# EAGLE board small_8x16 (EAGLE 6.2)
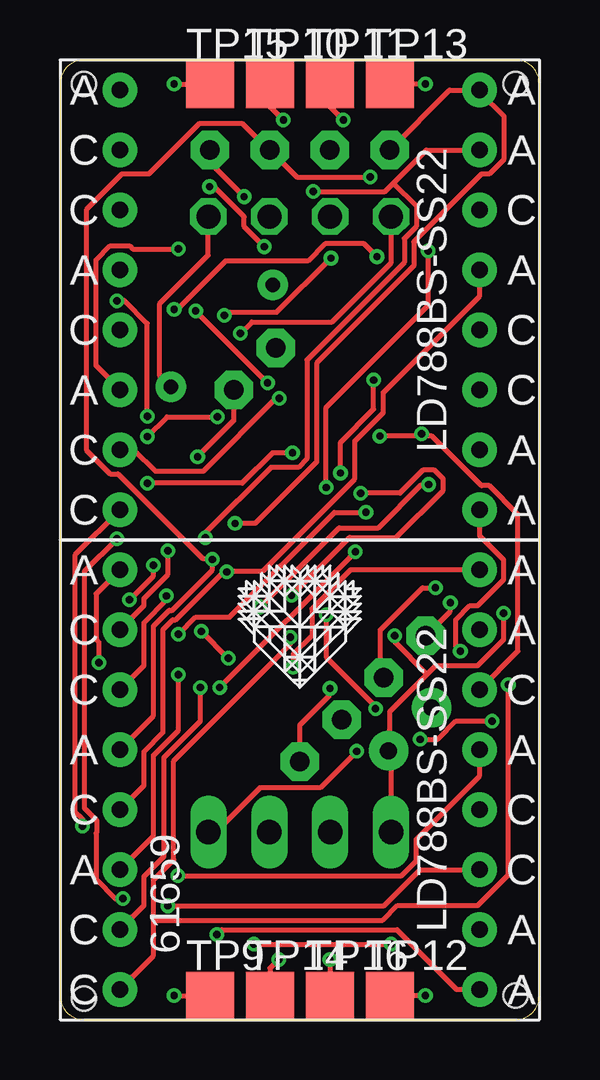
[diagram p0: board, top side]
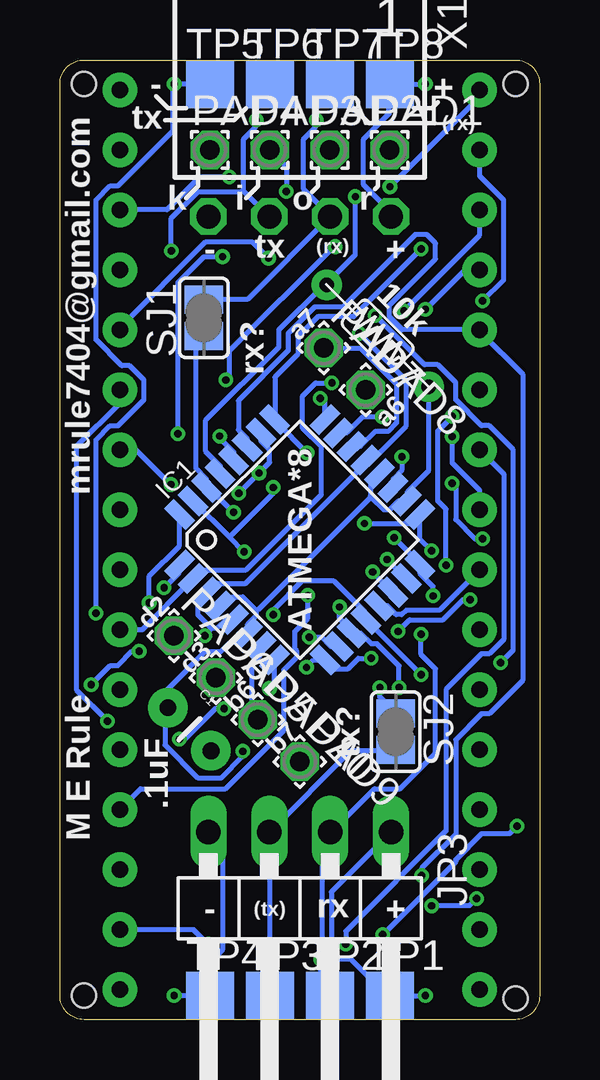
[diagram p1: board, bottom side, seen from below]

Size 20 x 40 mm. Coordinates in mm from the lower left corner, seen from the top.
Outline: 0,39 0,1 arc90 1,0 19,0 arc90 20,1 20,39 arc90 19,40 1,40 arc90 0,39
Copper layers (1*16): Top 0.035mm / dielectric 1.5mm / Bottom 0.035mm
Design rules: minimum track width 8mil, minimum drill 12mil, track to track 7mil, track to pad 7mil, pad to pad 7mil, via to via 7mil, smd to smd 0mil, copper to edge 10mil, drill to drill 10mil, minimum pad ring 10mil, minimum via ring 6mil, stop-mask expansion 2mil, vias tented up to drill 100mil, thermal gap 10mil
Holes 1 mm at 1,39 19,39 1,0.88 19,1

## Footprints (pad centres in the part's own frame; a part is rotated, then mirrored left to right if it is on the bottom)
CAP-PTH-SMALL = drill 0.7 pad 1.651: 1 0,0; 2 2.54,0
TQFP32-08 = smd 1.27 x 0.559: 1 -4.293,2.8; 2 -4.293,2; 3 -4.293,1.2; 4 -4.293,0.4; 5 -4.293,-0.4; 6 -4.293,-1.2; 7 -4.293,-2; 8 -4.293,-2.8; 17 4.293,-2.8; 18 4.293,-2; 19 4.293,-1.2; 20 4.293,-0.4; 21 4.293,0.4; 22 4.293,1.2; 23 4.293,2; 24 4.293,2.8 | smd 0.559 x 1.27: 9 -2.8,-4.293; 10 -2,-4.293; 11 -1.2,-4.293; 12 -0.4,-4.293; 13 0.4,-4.293; 14 1.2,-4.293; 15 2,-4.293; 16 2.8,-4.293; 25 2.8,4.293; 26 2,4.293; 27 1.2,4.293; 28 0.4,4.293; 29 -0.4,4.293; 30 -1.2,4.293; 31 -2,4.293; 32 -2.8,4.293
1X04/90 = drill 1.016 long: 1 -3.81,-3.81; 2 -1.27,-3.81; 3 1.27,-3.81; 4 3.81,-3.81
1,6/0,8 = drill 0.813 pad 1.6 octagon: 1 0,0
SJ = smd 1.168 x 1.6: 1 -0.762,0; 2 0.762,0
TP20SQ = smd 2 x 2: TP 0,0
LD788BS-SS22 = drill 0.7 pad 1.422: A1 -7.5,8.75; A2 -7.5,1.25; A3 -7.5,-3.75; A4 7.5,8.75; A5 7.5,6.25; A6 7.5,1.25; A7 7.5,-6.25; A8 7.5,-8.75; C1 -7.5,6.25; C2 -7.5,3.75; C3 -7.5,-1.25; C4 -7.5,-6.25; C5 -7.5,-8.75; C6 7.5,3.75; C7 7.5,-1.25; C8 7.5,-3.75
R-6 = drill 0.6 pad 1.27: P$1 -3,0; P$2 3,0
SSW-104-02-S-S-RA = drill 1 pad 1.5 octagon: 1 -3.81,1.524; 2 -1.27,1.524; 3 1.27,1.524; 4 3.81,1.524

## Placement (x,y rotation side)
C1  [CAP-PTH-SMALL]  15.5,13 315 bottom
IC1  MEGA8-AI  [TQFP32-08]  10,20 45 bottom
JP3  [1X04/90]  10,4 180 bottom
PAD1  [1,6/0,8]  6.25,36.25 0 bottom
PAD2  [1,6/0,8]  8.75,36.25 0 bottom
PAD3  [1,6/0,8]  11.25,36.25 0 bottom
PAD4  [1,6/0,8]  13.75,36.25 0 bottom
PAD5  [1,6/0,8]  13.5,14.25 315 bottom
PAD6  [1,6/0,8]  15.25,16 315 bottom
PAD7  [1,6/0,8]  9,28 315 bottom
PAD8  [1,6/0,8]  7.25,26.25 315 bottom
PAD9  [1,6/0,8]  10,10.75 315 bottom
PAD10  [1,6/0,8]  11.75,12.5 315 bottom
SJ1  [SJ]  14,29.25 90 bottom
SJ2  [SJ]  6,12 270 bottom
TP1  TPSQTP20SQ  [TP20SQ]  6.25,1 0 bottom
TP2  TPSQTP20SQ  [TP20SQ]  8.75,1 0 bottom
TP3  TPSQTP20SQ  [TP20SQ]  11.25,1 0 bottom
TP4  TPSQTP20SQ  [TP20SQ]  13.75,1 0 bottom
TP5  TPSQTP20SQ  [TP20SQ]  13.75,39 0 bottom
TP6  TPSQTP20SQ  [TP20SQ]  11.25,39 0 bottom
TP7  TPSQTP20SQ  [TP20SQ]  8.75,39 0 bottom
TP8  TPSQTP20SQ  [TP20SQ]  6.25,39 0 bottom
TP9  TPSQTP20SQ  [TP20SQ]  6.25,1 0 top
TP10  TPSQTP20SQ  [TP20SQ]  8.75,39 0 top
TP11  TPSQTP20SQ  [TP20SQ]  11.25,39 0 top
TP12  TPSQTP20SQ  [TP20SQ]  13.75,1 0 top
TP13  TPSQTP20SQ  [TP20SQ]  13.75,39 0 top
TP14  TPSQTP20SQ  [TP20SQ]  8.75,1 0 top
TP15  TPSQTP20SQ  [TP20SQ]  6.25,39 0 top
TP16  TPSQTP20SQ  [TP20SQ]  11.25,1 0 top
U$1  LD788BS-SS22  [LD788BS-SS22]  10,10 0 top
U$2  LD788BS-SS22  [LD788BS-SS22]  10,30 0 top
U$3  R-6  [R-6]  6.75,28.5 315 bottom
U$4  [LOGO]  10,16.38 0 top
X1  SSW-104-02-S-S-RA  [SSW-104-02-S-S-RA]  10,35 180 bottom

## Library data of the parts
C1 = SparkFun
IC1 = atmel; MPN: ATMEGA8-16AU; OC_FARNELL: 9171371; OC_NEWARK: 73M8863
JP3 = pinhead
PAD1-PAD10 = wirepad
SJ1 SJ2 = jumper
TP1-TP16 = testpad
U$1-U$3 = mrule
U$4 = mrule2
X1 = con-samtec; MPN: SSW-104-02-S-S-RA; OC_FARNELL: unknown; OC_NEWARK: 11P9385

## Nets
N$1: IC1.24 U$1.A7 U$2.C4
N$2: IC1.25 U$1.C8 U$2.A3
N$3: IC1.26 U$1.C7 U$2.A1
N$4: IC1.27 U$1.A6 U$2.C3
N$5: IC1.28 U$1.C6 U$2.A2
N$6: IC1.2 U$1.A5 U$2.C2
N$7: IC1.9 U$1.A4 U$2.C1
N$8: IC1.15 PAD2.1 U$1.A2 U$2.C6
N$9: IC1.14 U$1.C3 U$2.A6
N$10: IC1.13 U$1.A1 U$2.C7
N$11: IC1.12 U$1.A3 U$2.C8
N$12: IC1.11 U$1.C4 U$2.A7
N$13: IC1.10 U$1.C5 U$2.A8
N$14: IC1.16 PAD3.1 U$1.C2 U$2.A5
N$15: IC1.17 PAD4.1 U$1.C1 U$2.A4
N$16: IC1.1 PAD5.1
N$17: IC1.23 U$1.A8 U$2.C5
N$18: C1.2 IC1.3 IC1.5 IC1.21 JP3.4 TP4.TP TP5.TP TP12.TP TP13.TP X1.4
N$19: C1.1 IC1.4 IC1.6 IC1.18 IC1.20 JP3.1 TP1.TP TP8.TP TP9.TP TP15.TP U$3.P$2 X1.1
N$20: IC1.32 PAD6.1
N$21: SJ1.2 TP7.TP TP10.TP X1.2
N$22: JP3.3 SJ2.2 TP3.TP TP16.TP
N$23: IC1.31 SJ2.1 TP6.TP TP11.TP X1.3
N$24: IC1.30 JP3.2 SJ1.1 TP2.TP TP14.TP
N$25: IC1.29 PAD1.1 U$3.P$1
N$26: IC1.22 PAD7.1
N$27: IC1.19 PAD8.1
N$28: IC1.8 PAD9.1
N$29: IC1.7 PAD10.1

## Tracks (layer width: path | path; a pad name or v marks a point on that pad's centre or on a via)
N$1  (via drill 0.3)
  Top 0.203: v9.14,25.9 9.02,25.9 5.98,22.86 3.98,22.86 3.1,23.74 U$2.C4 | v8.08,3.14 v13.82,3.14
  Bottom 0.203: v9.14,25.9 8.96,25.72 8.96,25.02 IC1.24 | v13.82,3.14 14.42,3.74 U$1.A7 | v8.08,3.14 8.08,3.68 3.9,7.86 3.9,13.76 2.42,15.24 2.1,15.24 1.5,15.84 1.5,22.74 U$2.C4
N$2  (via drill 0.3)
  Top 0.203: v4.94,32.12 3.04,32.12 2.9,32.26 2.1,32.26 1.5,31.66 1.5,27.26 U$2.A3 | v4.5,4.74 13.52,4.74 15.02,6.24 U$1.C8 | v2.62,5.04 2.3,5.04 1.5,5.84 1.5,7.78 1.54,7.82 1.54,8.3 1.02,8.82 1.02,18.68 v2.38,20.04 | v3.64,22.36 7.6,22.36 8.86,23.62 v9.7,23.62
  Bottom 0.203: v4.94,32.12 7.76,29.3 9.24,29.3 10.08,28.46 10.08,27.74 11.04,26.78 11.04,25.02 IC1.25 11,24.92 v9.7,23.62 | v4.5,4.74 2.92,4.74 v2.62,5.04 | v2.38,20.04 2.7,20.04 3.5,20.84 3.5,22.22 v3.64,22.36
N$3  (via drill 0.3)
  Top 0.203: v12.54,21.94 14.18,21.94 15.14,22.9 15.62,22.9 15.98,22.54 15.98,22.06 14.02,20.1 12.08,20.1 v9.66,17.68 | v6.24,34.72 6.42,34.72 7.68,33.46 7.68,33.06 v8.52,32.22 | v13.08,26.66 13.08,25.44 11.7,24.06 v11.7,22.78
  Bottom 0.203: v12.54,21.94 v11.7,22.78 11.26,23.22 11.26,23.76 11.62,24.12 IC1.26 | v9.66,17.68 9.66,16.72 10.2,16.18 10.2,15.44 10.12,15.36 10.12,15.12 10.66,14.58 10.66,12.06 13.1,9.62 16.64,9.62 U$1.C7 | U$2.A1 2.5,38.46 v6.24,34.72 | v8.52,32.22 8.58,32.22 12.92,27.88 12.92,26.82 v13.08,26.66
N$4  (via drill 0.3)
  Top 0.203: U$1.A6 17.5,10.16 14.86,7.52 14.86,6.62 14.24,6 v4.92,6
  Bottom 0.203: IC1.27 12.2,23.9 12.2,24.22 12.56,24.58 12.56,25.8 10.48,27.88 10.48,28.6 9.38,29.7 8.2,29.7 5.18,32.72 4.7,32.72 4.34,32.36 4.34,31.7 6.26,29.78 6.26,29.3 5.72,28.76 U$2.C3 2.46,28.66 0.7,26.9 0.7,14.14 2.1,12.74 2.42,12.74 3.5,11.66 3.5,7.72 4.92,6.3 v4.92,6
N$5  (via drill 0.3)
  Top 0.203: 15.08,24.32 15.52,24.32 17.58,22.26 17.9,22.26 19.1,21.06 19.1,15.36 U$1.C6 | 15.08,24.32 v13.34,24.32 | v4.76,29.6 4.88,29.6 6.9,31.62 10.34,31.62 11.06,32.34 12.68,32.34 v13.22,31.8 | v15.08,24.42 15.08,24.32
  Bottom 0.203: v13.34,24.32 13.34,24.24 12.76,23.66 IC1.28 | v4.76,29.6 3.12,31.24 U$2.A2 | v13.22,31.8 14,31.8 15.08,30.72 v15.08,24.42
N$6  (via drill 0.3)
  Top 0.203: v8.66,26.54 v5.66,29.54
  Bottom 0.203: U$1.A5 16.56,16.26 14.46,18.36 IC1.2 14.36,18.42 14.04,18.74 12.24,18.74 9.1,21.88 9.1,23.86 9.88,24.64 9.88,26 9.34,26.54 v8.66,26.54 | U$2.C2 2.5,32.7 v5.66,29.54
N$7  (via drill 0.3)
  Top 0.203: v9.72,14.68 9.72,15.22 10.5,16 10.5,17.12 12.12,18.74 U$1.A4 | v2.38,29.96 2.7,29.96 3.64,29.02 v3.64,25.14 | v3.9,18.94 3.9,18.5 v2.9,17.5 | v7.02,15.06 v5.9,16.18
  Bottom 0.203: v9.72,14.68 9.42,14.98 8.96,14.98 IC1.9 8.88,14.9 8.6,14.62 8,14.62 7.56,15.06 v7.02,15.06 | U$2.C1 2.5,35.16 1.5,34.16 1.5,30.84 v2.38,29.96 | v3.64,25.14 4.24,24.54 4.24,21.62 3.9,21.28 v3.9,18.94 | v2.9,17.5 3.2,17.5 4.04,16.66 5.42,16.66 v5.9,16.18
N$8  (via drill 0.3)
  Top 0.203: U$1.A2 3.9,12.66 3.9,16.4 4.56,17.06 4.68,17.06 6.36,18.74 v6.36,19.18 6.26,19.22 5.94,19.22 2.42,22.74 2.1,22.74 1.1,23.74 1.1,33.76 2.58,35.24 3.7,35.24 5.8,37.34 7.62,37.34 8.66,36.3 PAD2.1 9.88,35.12 v12.94,35.12
  Bottom 0.203: v6.36,19.18 IC1.15 | v12.94,35.12 14.18,35.12 15.54,33.76 U$2.C6
N$9  (via drill 0.3)
  Top 0.203: U$1.C3 3.5,9.76 3.5,11.16 4.3,11.96 4.3,16.26 4.7,16.66 4.82,16.66 6.82,18.66 v6.96,18.66 7.06,18.7 8.46,18.7 12.3,22.54 12.3,24.12 13.48,25.3 13.48,26.14 17.5,30.16 U$2.A6
  Bottom 0.203: v6.96,18.66 IC1.14
N$10  (via drill 0.3)
  Top 0.203: v11.3,31.74 9.04,29.48 6.98,29.48 v6.86,29.36 | v1.62,14.88 1.62,15.72 1.5,15.84 1.5,17.74 U$1.A1
  Bottom 0.203: IC1.13 6.34,17.24 5.98,16.88 5.74,16.88 5.56,17.06 4.18,17.06 U$1.A1 | U$2.C7 17.5,28.84 13.94,32.4 11.96,32.4 v11.3,31.74 | v6.86,29.36 4.8,27.3 4.24,27.3 3.5,26.56 3.5,25.84 2.42,24.76 2.1,24.76 1.1,23.76 1.1,15.4 v1.62,14.88
N$11  (via drill 0.3)
  Top 0.203: v4.94,14.38 4.94,12.06 3.9,11.02 3.9,7.66 U$1.A3 | v18.02,12.44 16.52,12.44 15.76,11.68 v15.02,11.68 | v13.16,12.96 13.16,13.06 11.1,15.12 v11.1,16.88
  Bottom 0.203: v4.94,14.38 IC1.12 7.28,16.78 7.28,16.98 8.58,18.28 9.9,18.28 11.1,17.08 v11.1,16.88 | U$2.C8 17.5,25.7 19.3,23.9 19.3,13.72 v18.02,12.44 | v15.02,11.68 14.8,11.68 13.52,12.96 v13.16,12.96
N$12  (via drill 0.3)
  Top 0.203: v5.86,13.84 5.86,12.44 4.34,10.92 4.34,6.8 3.5,5.96 3.5,4.76 U$1.C4 | v15.38,22.3 15.08,22.3 13.28,20.5 11.64,20.5 v8.34,17.2
  Bottom 0.203: v5.86,13.84 5.86,14.74 6.78,15.66 7.02,15.66 7.46,16.1 7.8,16.1 IC1.11 7.84,16.22 8.34,16.72 v8.34,17.2 | v15.38,22.3 16.82,23.74 U$2.A7
N$13  (via drill 0.3)
  Top 0.203: v9.6,15.94 9.6,15.64 4.74,10.78 4.74,6.66 3.9,5.82 3.9,4.14 | 3.9,4.14 3.9,2.66 U$1.C5 | U$2.A8 17.5,20.16 18.5,19.16 18.5,18.34 17.42,17.26 17.1,17.26 16.5,16.66 16.5,15.56 v16.7,15.36 | v18.7,13.96 18.7,6.04 17.42,4.76 14.08,4.76 13.46,4.14 3.9,4.14
  Bottom 0.203: v9.6,15.94 9.1,15.94 8.72,15.56 IC1.10 | v16.7,15.36 16.98,15.36 17.58,14.76 17.9,14.76 v18.7,13.96
N$14  (via drill 0.3)
  Top 0.203: v4.44,17.66 4.44,17.48 3.5,16.54 3.5,14.76 U$1.C2 | 13.91,34.87 13.56,34.52 v10.56,34.52 | 13.91,34.87 15.28,36.24 U$2.A5 | v6.06,20.08 6.06,20.28 8.8,23.02 9.94,23.02 10.3,23.38 10.3,27.5 14.36,31.56 14.36,32.56 14.86,33.06 14.86,33.92 13.91,34.87
  Bottom 0.203: v4.44,17.66 4.44,18.06 4.98,18.6 IC1.16 5.02,19.04 v6.06,20.08 | v10.56,34.52 10.56,35.56 PAD3.1
N$15  (via drill 0.3)
  Top 0.203: v4.5,19.54 4.5,18.56 3.5,17.56 3.5,17.26 U$1.C1 | PAD4.1 16.24,38.74 U$2.A4 17.54,38.64 18.5,37.68 18.5,35.84 17.9,35.24 17.58,35.24 14.76,32.42 14.76,31.42 10.7,27.36 10.7,23.24 8.14,20.68 v7.3,20.68
  Bottom 0.203: v4.5,19.54 4.98,20.02 4.98,21.04 IC1.17 5.08,20.68 v7.3,20.68
N$16  (via drill 0.3)
  Top 0.203: v15.66,18 15.12,18 13.36,16.24 13.36,14.4 PAD5.1
  Bottom 0.203: v15.66,18 15.02,18.64 IC1.1
N$17  (via drill 0.3)
  Top 0.203: v6.56,25.12 4.46,25.12 v3.64,24.3 | v6.54,3.54 6.74,3.74 14.06,3.74 16.54,1.26 U$1.A8 | v0.94,8.06 0.94,8.36 0.62,8.68 0.62,19.36 U$2.C5
  Bottom 0.203: v6.56,25.12 7.38,25.12 8.04,24.46 8.36,24.46 IC1.23 | v3.64,24.3 3.64,23.2 2.5,22.06 U$2.C5 | v6.54,3.54 3.5,6.58 3.5,6.66 2.42,7.74 1.26,7.74 v0.94,8.06
N$18  (via drill 0.3)
  Top 0.203: v7.52,28.6 8,29.08 11.34,29.08 13.82,31.56 13.82,33.46 X1.4 | v15.24,1 TP12.TP | v15.24,39 TP13.TP | v18.5,16.94 18.5,15.84 17.42,14.76 15.68,14.76 15.31,14.39 | 15.31,14.39 13.76,12.84 13.76,11.26 13.72,11.22 C1.2 13.8,11.16 JP3.4 | v13.96,16 13.96,15.74 15.31,14.39
  Bottom 0.203: 13.7,16.32 13.44,16.32 13.08,16.68 IC1.5 | 13.7,16.32 14.26,16.88 14.26,17.44 13.9,17.8 IC1.3 13.78,17.84 13.44,18.18 12.26,18.18 7.26,23.18 7.26,23.3 IC1.21 7.16,23.14 5.56,24.74 5.56,26.64 v7.52,28.6 | v15.24,1 TP12.TP 13.72,1.1 13.72,2.4 13.22,2.9 13.22,7.22 JP3.4 | TP13.TP v15.24,39 15.28,38.9 15.28,37.06 17.58,34.76 17.9,34.76 18.5,34.16 18.5,28.34 17.42,27.26 17.1,27.26 16.5,26.66 16.5,25.84 17.58,24.76 17.9,24.76 18.5,24.16 v18.5,16.94 | v13.96,16 13.74,16.22 13.7,16.32
N$19  (via drill 0.3)
  Top 0.203: v4.76,1 TP9.TP | v4.76,39 TP15.TP | X1.1 6.18,33.46 6.18,31.86 4.16,29.84 4.16,26.84 U$3.P$2 | v12.38,11.18 10.86,9.66 8.34,9.66 6.5,7.82 JP3.1
  Bottom 0.203: v4.76,1 TP9.TP 6.34,1.04 6.38,1.04 7.88,2.54 8.32,2.54 8.68,2.9 8.68,5.32 JP3.1 | v4.76,39 TP15.TP 6.28,38.9 6.28,37.76 7.34,36.7 7.34,34.8 6.2,33.66 X1.1 | 7.03,21.79 7.06,21.82 7.06,22.38 6.7,22.74 IC1.20 | 7.03,21.79 6.5,21.26 6.24,21.26 5.88,21.62 IC1.18 5.52,21.72 5.52,21.98 4.64,22.86 4.64,26.36 U$3.P$2 | 11.82,17.06 11.82,16.82 12.18,16.46 IC1.6 12.28,16.08 12.56,16.08 13.3,15.34 13.94,15.34 15.5,13.78 C1.1 15.54,12.9 15.62,12.82 15.62,11.44 14.26,10.08 13.26,10.08 12.38,10.96 v12.38,11.18 | 11.82,17.06 12.38,17.62 12.94,17.62 13.3,17.26 IC1.4 | 7.03,21.79 11.72,17.1 11.82,17.06
N$20  (via drill 0.3)
  Top 0.203: v16.28,17.38 16.28,17.02 PAD6.1
  Bottom 0.203: v16.28,17.38 16.28,18.48 15.02,19.74 15.02,21.04 IC1.32
N$21  (via drill 0.3)
  Top 0.203: v9.32,37.5 8.76,38.06 TP10.TP
  Bottom 0.203: TP10.TP 9.32,38.44 v9.32,37.5 9.36,37.4 9.36,37.18 9.84,36.7 9.84,34.62 8.78,33.56 X1.2 8.74,33.46 12.18,30.02 SJ1.2
N$22  (via drill 0.3)
  Top 0.203: v11.26,2.5 TP16.TP
  Bottom 0.203: TP16.TP v11.26,2.5 11.26,7.72 JP3.3 7.86,11.22 6,11.22 SJ2.2
N$23  (via drill 0.3)
  Top 0.203: v11.82,37.5 11.26,38.06 TP11.TP | v6.66,13.84 v12.32,19.5 | v15.36,32.04 15.36,29.78 11.1,25.52 v11.1,22.18
  Bottom 0.203: TP11.TP 11.82,38.44 v11.82,37.5 11.86,37.4 11.86,37.18 12.34,36.7 12.34,34.54 | 12.34,34.54 X1.3 | v12.32,19.5 12.93,20.11 | 12.93,20.11 IC1.31 | v6.66,13.84 6.66,13.44 6,12.78 SJ2.1 | v15.36,32.04 15.36,33.4 14.24,34.52 12.44,34.52 12.34,34.54 | v11.1,22.18 11.1,21.94 12.93,20.11
N$24  (via drill 0.3)
  Top 0.203: v9.12,2.5 8.76,2.14 TP14.TP | v12.76,21.14 11.44,21.14 7.08,16.78 5.66,16.78 v4.94,16.06
  Bottom 0.203: SJ1.1 14.34,28.14 14.34,22.98 13.9,22.54 13.9,22.2 IC1.30 13.78,22.16 v12.76,21.14 | TP14.TP 9.12,1.36 v9.12,2.5 9.08,2.6 9.08,7.46 JP3.2 8.64,7.86 6.88,9.62 5.82,9.62 4.34,11.1 4.34,14.62 4.94,15.22 v4.94,16.06
N$25  (via drill 0.3)
  Top 0.203: v7.68,34.3 6.26,35.72 PAD1.1
  Bottom 0.203: IC1.29 13.32,23.08 13.94,23.7 13.94,24.96 10.88,28.02 10.88,28.74 9,30.62 U$3.P$1 8.84,30.72 7.68,31.88 v7.68,34.3
N$26
  Bottom 0.203: PAD7.1 7.46,28 5.96,26.5 5.96,24.88 6.32,24.52 6.84,24.52 7.46,23.9 7.8,23.9 IC1.22
N$27  (via drill 0.3)
  Top 0.203: v5.74,23.46 7.24,24.96 PAD8.1
  Bottom 0.203: v5.74,23.46 5.74,22.9 6.1,22.54 6.1,22.2 IC1.19
N$28  (via drill 0.3)
  Top 0.203: v11.26,13.8 11.26,13.54 10,12.28 PAD9.1
  Bottom 0.203: v11.26,13.8 11.06,14 IC1.8
N$29
  Bottom 0.203: IC1.7 11.64,15.54 11.64,15.2 12,14.84 12,12.74 PAD10.1

## Text on the board
tPlace: 61659
bPlace: + | - | tx | (rx) | r | o | i | k | + | (rx) | tx | - | 10k | mrule7404@gmail.com | a7 | rx? | a6 | ATMEGA*8 | d2 | d3 | b6 | tx? | b7 | .1uF | M E Rule | + | rx | (tx) | -